# EAGLE board Glove Module- V1 Alle (EAGLE 6.6.0)
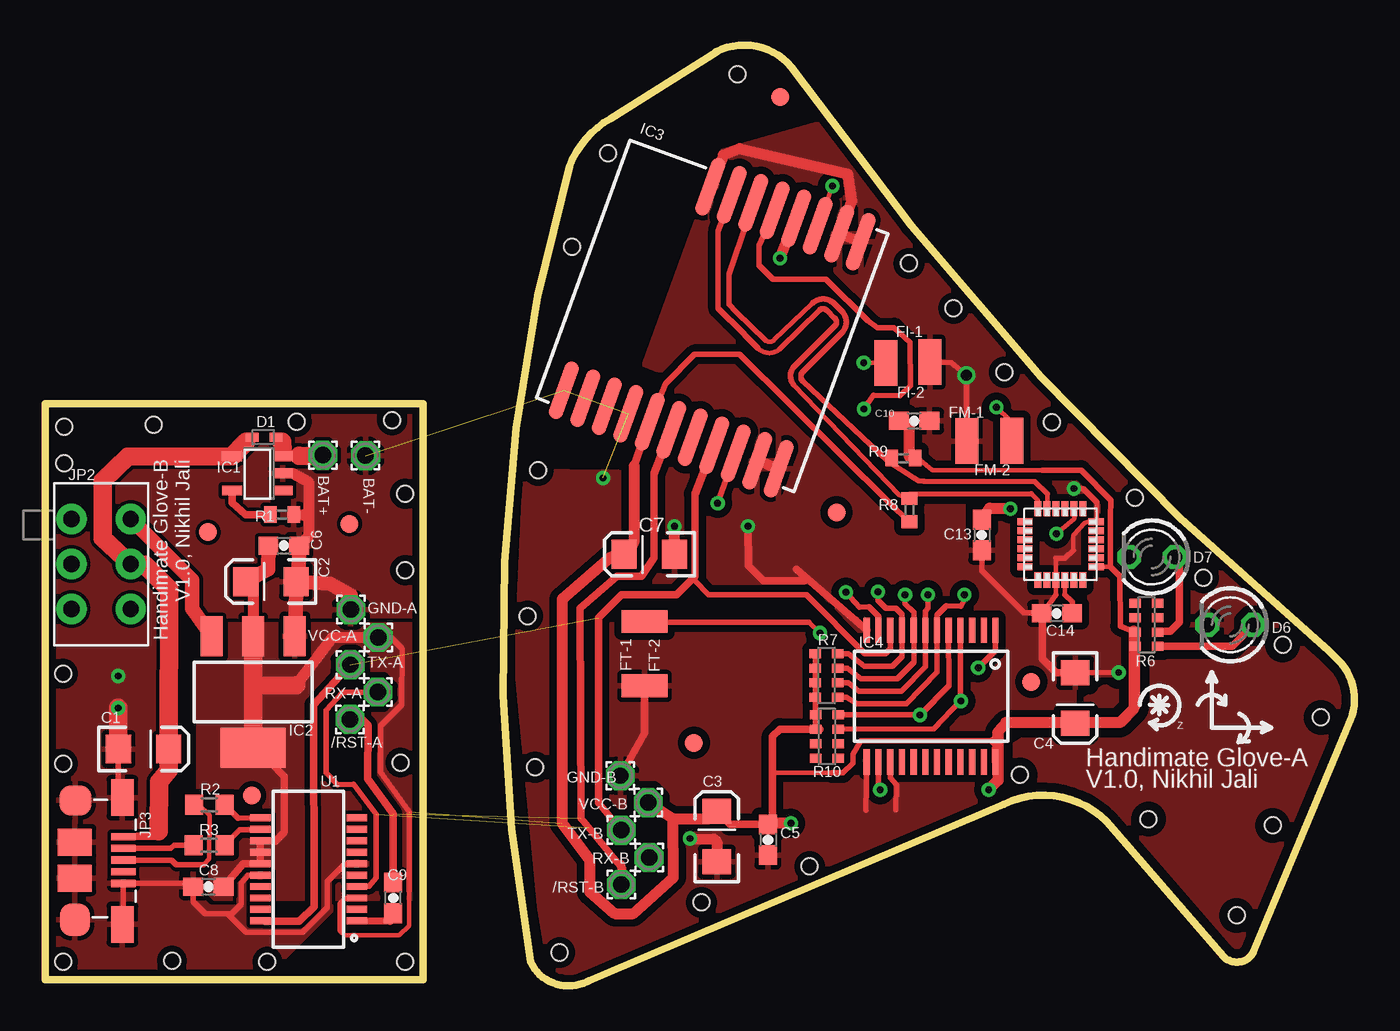
[diagram p0: board, top side]
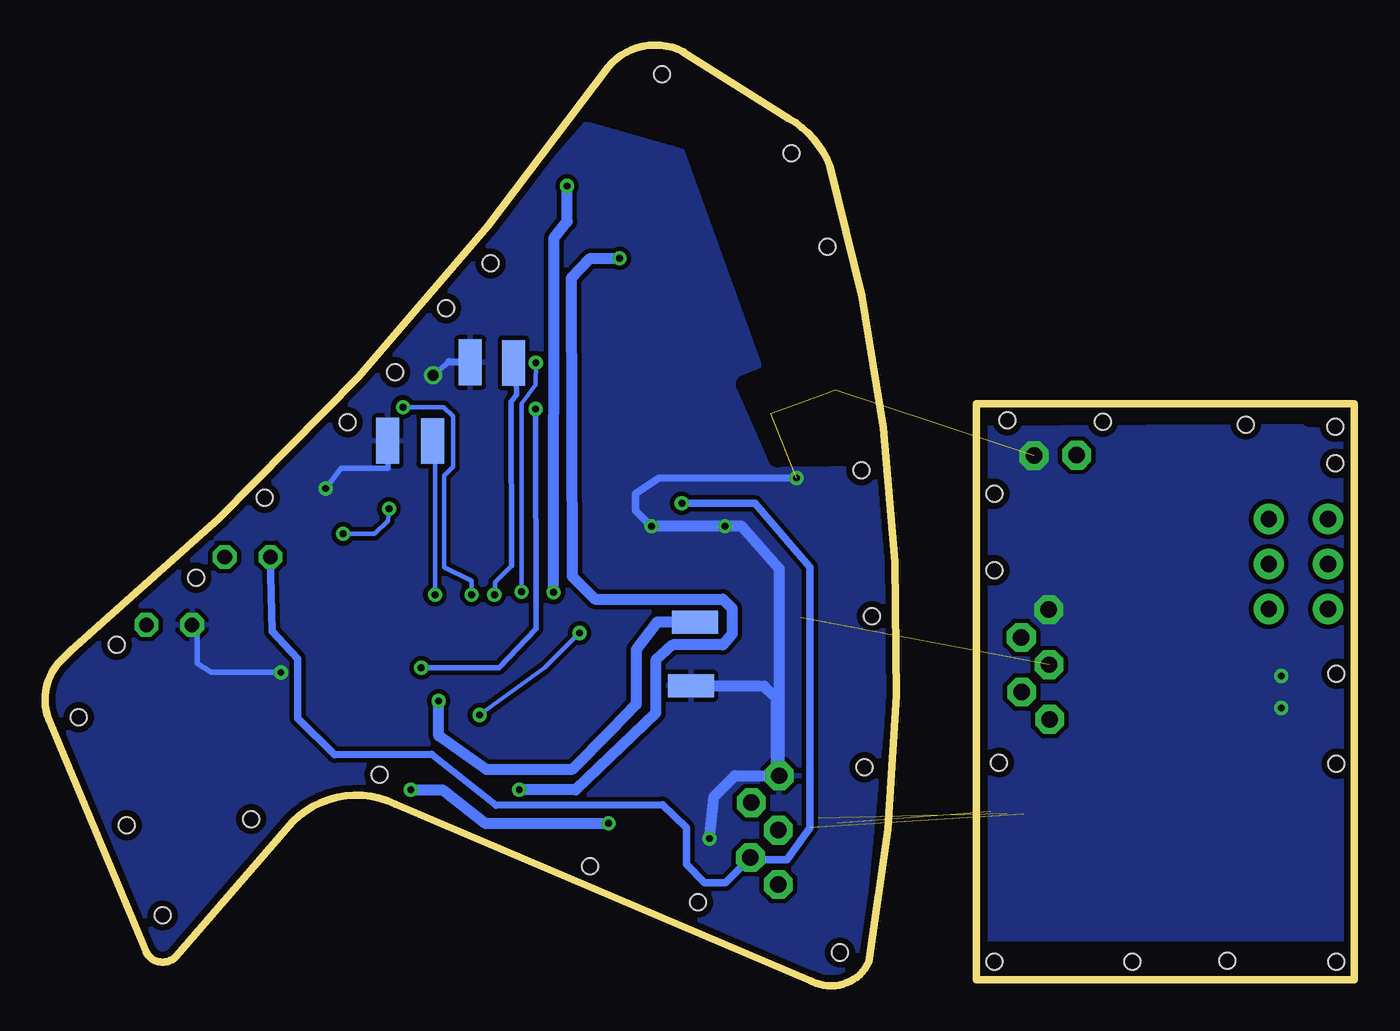
[diagram p1: board, bottom side, seen from below]

Size 72.76 x 52.27 mm. Coordinates in mm from the lower left corner, seen from the top.
Outline: 67.14,1.88 arc-110 65.48,1.65 58.99,9.13 arc71 53.29,10.1
Outline: 37.29,51.89 arc-77 41.48,51.04 arc15 71.32,18.61 71.83,18.12 arc-69 72.53,14.76 67.14,1.89
Outline: 37.34,51.89 31.42,48.18 arc39 29.14,45.54 arc26 26.99,1.34 arc92 30.12,0.25 30.24,0.29 53.29,10.09
Outline: 0,32.35 0,0.35 21,0.35 21,32.35 0,32.35
Copper layers (1*16): Top 0.035mm / dielectric 1.5mm / Bottom 0.035mm
Design rules "4pcb-Advanced Circuits": minimum track width 10mil, minimum drill 15mil, track to track 8mil, track to pad 8mil, pad to pad 8mil, via to via 8mil, smd to smd 8mil, copper to edge 15mil, drill to drill 8mil, minimum pad ring 10mil, minimum via ring 8mil, stop-mask expansion 4mil, vias tented up to drill 0mil, thermal gap 10mil
Holes 0.9 mm at 19.29,31.43 20,1.35 1,1.35 1,17.35 1,12.35 1.08,29.02 20,23.08 12.36,1.35 7.06,1.39 6.04,31.19 20,27.35 13.98,31.34 19.75,12.41 28.6,1.86 27.23,12.14 26.8,20.55 27.39,28.64 31.3,46.25 38.49,50.64 50.49,37.64 55.96,31.3 47.99,40.13 53.32,34.1 60.56,27.11 64.37,22.67 68.78,18.94 70.89,14.92 68.21,8.92 61.31,9.27 54.17,11.73 42.49,6.64 36.49,4.64 66.21,3.92 29.27,41.05 1.08,31.05
tRestrict: area 26.3,29.4 to 33.8,35.7; 2 lines
bRestrict: area 26.3,29.4 to 33.8,35.7; 8 lines

## Footprints (pad centres in the part's own frame; a part is rotated, then mirrored left to right if it is on the bottom)
1,6/0,9 = drill 0.914 pad 1.6 octagon: 1 0,0
EIA3216 = smd 1.4 x 1.6: A 1.4,0; C -1.4,0
0603-CAP = smd 1.1 x 1: 1 -0.85,0; 2 0.85,0
SOD523 = smd 0.7 x 0.5: A 0.7,0; C -0.6,0
LED3MM = drill 0.813 octagon: A -1.27,0; K 1.27,0
SMD1,27-2,54 = smd 1.27 x 2.54: 1 0,0
FIDUCIAL-1X2 = smd 1 x 1: 1 0,0
SOT23-5 = smd 0.55 x 1.1: 1 -0.95,-1.3; 2 0,-1.3; 3 0.95,-1.3; 4 0.95,1.5; 5 -0.95,1.5
SOT223 = smd 1.219 x 2.235: 1 -2.311,-3.099; 2 0,-3.099; 3 2.311,-3.099 | smd 3.6 x 2.2: 4 0,3.099
RFD22301 = smd 3.353 x 0.813: 1 0,0; 2 0,-1.27; 3 0,-2.54; 4 0,-3.81; 5 0,-5.08; 6 0,-6.35; 7 0,-7.62; 8 0,-8.89; 9 13.411,-12.675; 10 13.411,-11.405; 11 13.411,-10.135; 12 13.411,-8.865; 13 13.411,-7.595; 14 13.411,-6.325; 15 13.411,-5.055; 16 13.411,-3.785; 17 13.411,-2.515; 18 13.411,-1.245; 19 13.411,0.025
SSOP24 = smd 0.348 x 1.397: 1 -3.575,-3.656; 2 -2.925,-3.656; 3 -2.275,-3.656; 4 -1.625,-3.656; 5 -0.975,-3.656; 6 -0.325,-3.656; 7 0.325,-3.656; 8 0.975,-3.656; 9 1.625,-3.656; 10 2.275,-3.656; 11 2.925,-3.656; 12 3.575,-3.656; 13 3.575,3.656; 14 2.925,3.656; 15 2.275,3.656; 16 1.625,3.656; 17 0.975,3.656; 18 0.325,3.656; 19 -0.325,3.656; 20 -0.975,3.656; 21 -1.625,3.656; 22 -2.275,3.656; 23 -2.925,3.656; 24 -3.575,3.656
QFN.24.4X4 = smd 0.85 x 0.38: 1 -1.975,1.25; 2 -1.975,0.75; 3 -1.975,0.25; 4 -1.975,-0.25; 5 -1.975,-0.75; 6 -1.975,-1.25; 13 1.975,-1.25; 14 1.975,-0.75; 15 1.975,-0.25; 16 1.975,0.25; 17 1.975,0.75; 18 1.975,1.25 | smd 0.38 x 0.85: 7 -1.25,-1.975; 8 -0.75,-1.975; 9 -0.25,-1.975; 10 0.25,-1.975; 11 0.75,-1.975; 12 1.25,-1.975; 19 1.25,1.975; 20 0.75,1.975; 21 0.25,1.975; 22 -0.25,1.975; 23 -0.75,1.975; 24 -1.25,1.975
SWITCHE-DPDT = drill 0.9 pad 1.676: 1 -2.559,1.579; 2 -0.059,1.579; 3 2.441,1.579; 4 -2.559,-1.721; 5 -0.059,-1.721; 6 2.441,-1.721
USB-MICRO-MOLEX-105017-0001 = smd 0.4 x 1.35: 1 -1.34,1.27; 2 -0.69,1.27; 3 -0.04,1.27; 4 0.61,1.27; 5 1.26,1.27 | smd 2.032 x 1.27: P$1 -3.505,1.219; P$6 3.531,1.219 | smd 1.651 x 1.778: P$2 -3.353,-1.397 | smd 1.5 x 1.9: P$3 -1.04,-1.43; P$4 0.96,-1.43 | smd 1.778 x 1.651: P$5 3.277,-1.422
R0402 = smd 0.7 x 0.9: 1 -0.65,0; 2 0.65,0
R0603 = smd 1 x 1.1: 1 -0.85,0; 2 0.85,0
0603-ARV = smd 0.5 x 0.65: 1 -1.2,-0.625; 2 -0.4,-0.625; 3 0.4,-0.625; 4 1.2,-0.625; 5 1.2,0.625; 6 0.4,0.625; 7 -0.4,0.625; 8 -1.2,0.625
SSOP20_L = smd 0.381 x 1.143: 1 -2.857,-2.68; 2 -2.223,-2.68; 3 -1.587,-2.68; 4 -0.953,-2.68; 5 -0.318,-2.68; 6 0.318,-2.68; 7 0.953,-2.68; 8 1.587,-2.68; 9 2.223,-2.68; 10 2.857,-2.68; 11 2.857,2.68; 12 2.223,2.68; 13 1.587,2.68; 14 0.953,2.68; 15 0.318,2.68; 16 -0.318,2.68; 17 -0.953,2.68; 18 -1.587,2.68; 19 -2.223,2.68; 20 -2.857,2.68

## Placement (x,y rotation side)
/RST-A  [1,6/0,9]  16.94,14.81 0 top
/RST-B  [1,6/0,9]  32.02,5.63 90 top
BAT+  Bat+  [1,6/0,9]  15.44,29.48 270 top
BAT-  Bat-  [1,6/0,9]  17.81,29.46 270 top
C1  10uF  [EIA3216]  5.48,13.16 0 top
C2  10uF  [EIA3216]  12.55,22.46 180 top
C3  10uF  [EIA3216]  37.33,8.3 90 top
C4  10uF  [EIA3216]  57.24,16 270 top
C5  0.1uF  [0603-CAP]  40.17,8.12 270 top
C6  0.1uF  [0603-CAP]  13.27,24.46 0 top
C7  10uF  [EIA3216]  33.58,23.98 180 top
C8  0.1uF  [0603-CAP]  9.09,5.51 180 top
C9  0.1uF  [0603-CAP]  19.35,4.9 90 top
C10  0.1uF  [0603-CAP]  48.3,31.39 0 top
C13  2.2nF  [0603-CAP]  52.05,25.05 270 top
C14  0.1uF  [0603-CAP]  56.22,20.7 180 top
D1  PMEG3005EB  [SOD523]  12.13,30.49 0 top
D6  Green  [LED3MM]  65.86,20.06 180 top
D7  Red  [LED3MM]  61.51,23.83 180 top
FI-1  WIREPADSMD1,27-254  [SMD1,27-2,54]  46.72,34.61 0 top
FI-2  WIREPADSMD1,27-254  [SMD1,27-2,54]  46.73,34.61 0 bottom
FID1  FIDUCIAL1X2  [FIDUCIAL-1X2]  16.92,25.67 270 top
FID2  FIDUCIAL1X2  [FIDUCIAL-1X2]  11.49,10.59 270 top
FID3  FIDUCIAL1X2  [FIDUCIAL-1X2]  36.06,13.51 0 top
FID4  FIDUCIAL1X2  [FIDUCIAL-1X2]  9.06,25.22 270 top
FID5  FIDUCIAL1X2  [FIDUCIAL-1X2]  54.8,16.89 0 top
FID6  FIDUCIAL1X2  [FIDUCIAL-1X2]  40.85,49.37 0 top
FID7  FIDUCIAL1X2  [FIDUCIAL-1X2]  43.98,26.31 0 top
FM-1  WIREPADSMD1,27-254  [SMD1,27-2,54]  53.72,30.29 180 top
FM-2  WIREPADSMD1,27-254  [SMD1,27-2,54]  51.23,30.26 0 bottom
FT-1  WIREPADSMD1,27-254  [SMD1,27-2,54]  33.31,20.25 90 top
FT-2  WIREPADSMD1,27-254  [SMD1,27-2,54]  36.64,20.21 90 bottom
G1  WIREPADSMD1,27-254  [SMD1,27-2,54]  49.16,34.66 180 top
G2  WIREPADSMD1,27-254  [SMD1,27-2,54]  49.14,34.64 180 bottom
G3  WIREPADSMD1,27-254  [SMD1,27-2,54]  33.31,16.67 270 top
G4  WIREPADSMD1,27-254  [SMD1,27-2,54]  36.87,16.67 90 bottom
G5  WIREPADSMD1,27-254  [SMD1,27-2,54]  51.23,30.26 0 top
G6  WIREPADSMD1,27-254  [SMD1,27-2,54]  53.72,30.29 0 bottom
GND-A  [1,6/0,9]  16.99,20.9 0 top
GND-B  [1,6/0,9]  31.97,11.68 90 top
IC1  MCP73831  [SOT23-5]  11.9,28.47 90 top
IC2  AZ1117CH-3.3TRG1  [SOT223]  11.57,16.33 180 top
IC3  RF22301  [RFD22301]  45.33,41.35 250 top
IC4  MUX-74HC4067SMD  [SSOP24]  49.24,16.1 180 top
IC5  MPU-6050  [QFN.24.4X4]  56.43,24.53 0 top
JP2  [SWITCHE-DPDT]  3.19,23.38 270 top
JP3  USB-CON-5PIN-105017-0001  [USB-MICRO-MOLEX-105017-0001]  3.08,6.95 270 top
R1  10k  [R0402]  13.18,26.19 180 top
R2  27E  [R0603]  9.14,10.07 180 top
R3  27E  [R0603]  9.12,7.82 180 top
R6  75E  [0603-ARV]  61.2,20.06 90 top
R7  150k  [0603-ARV]  43.42,17.24 270 top
R8  10k  [R0402]  48.03,26.44 270 top
R9  10k  [R0402]  47.69,29.32 0 top
R10  150k  [0603-ARV]  43.45,13.86 270 top
RX-A  [1,6/0,9]  18.49,16.33 0 top
RX-B  [1,6/0,9]  33.57,7.13 90 top
TX-A  [1,6/0,9]  16.97,17.84 0 top
TX-B  [1,6/0,9]  32.02,8.66 90 top
U1  FTS31XS-U  [SSOP20_L]  14.64,6.48 90 top
VCC-A  [1,6/0,9]  18.52,19.36 0 top
VCC-B  [1,6/0,9]  33.52,10.18 90 top

## Library data of the parts
/RST-A /RST-B BAT+ BAT- FI-1 FI-2 FM-1 FM-2 FT-1 FT-2 G1-G6 GND-A GND-B RX-A RX-B TX-A TX-B VCC-A VCC-B = wirepad
C1-C4 C7 = SparkFun-Capacitors; PROD_ID: CAP-00811
C5 C6 C8-C10 C13 C14 = SparkFun-Capacitors; PROD_ID: CAP-08604
D1 = diode
D6 D7 = led
FID1-FID7 = SparkFun-Aesthetics
IC1 IC3 JP3 = GeekAmmo
IC2 = SparkFun-PowerIC; PROD_ID: VREG-08170
IC4 = SparkFun-AnalogIC
IC5 = MPU6050
JP2 = Switch
R1 R8 R9 = rcl
R2 R3 = resistor
R6 R7 R10 = SparkFun-Passives
U1 = SparkFun-DigitalIC; PROD_ID: IC-11524

## Nets
+5V: C1.A D1.C IC1.4 JP2.2 JP3.1
ACOM: IC3.5 IC4.1
GND: BAT-.1 C1.C C2.C C3.C C4.C C5.2 C6.2 C7.C C8.2 C10.2 C13.2 C14.2 D6.K G1.1 G2.1 G3.1 G4.1 G5.1 G6.1 GND-A.1 GND-B.1 IC1.2 IC2.1 IC3.1 IC3.2 IC3.8 IC3.9 IC3.10 IC3.12 IC3.18 IC3.19 IC4.12 IC4.13 IC4.15 IC5.9 IC5.18 JP3.5 JP3.P$1 JP3.P$2 JP3.P$3 JP3.P$4 JP3.P$5 JP3.P$6 R1.1 U1.6 U1.16
I2C_N: IC3.7 IC5.24 R8.1
I2C_P: IC3.6 IC5.23 R9.1
N$1: C9.1 U1.1
N$2: JP3.2 R3.2
N$3: IC1.5 R1.2
N$4: JP3.3 R2.2
N$5: D6.A R6.1
N$6: D7.A R6.2
N$7: IC2.3 JP2.1
N$8: BAT+.1 D1.A IC1.3
N$9: FI-1.1 IC4.9 R7.8
N$10: C14.1 IC5.10
N$11: C13.1 IC5.20
N$12: FI-2.1 IC4.8 R7.7
N$13: FM-1.1 IC4.7 R7.6
N$14: FM-2.1 IC4.6 R7.5
N$15: FT-1.1 IC4.5 R10.8
N$16: FT-2.1 IC4.4 R10.7
RST/: /RST-A.1 /RST-B.1 C9.2 IC3.14
RX/LED: D7.K IC3.17 RX-A.1 RX-B.1 U1.4
S1: IC3.3 IC4.11
S2: IC3.4 IC4.14
TX/S0: IC3.16 IC4.10 TX-A.1 TX-B.1 U1.20
USB-NEG: R3.1 U1.12
USB-POS: R2.1 U1.11
VCC: C2.A C3.A C4.A C5.1 C6.1 C7.A C8.1 C10.1 IC2.2 IC2.4 IC3.13 IC4.24 IC5.13 R6.7 R6.8 R7.1 R7.2 R7.3 R7.4 R8.2 R9.2 R10.1 R10.2 U1.3 U1.13 U1.14 U1.15 VCC-A.1 VCC-B.1

## Tracks (layer width: path | path; a pad name or v marks a point on that pad's centre or on a via)
+5V
  Top 0.254: D1.C 11.19,30.22
  Top 0.406: 6.31,8.59 6.31,8.31 5.12,8.31 JP3.1
  Top 0.813: IC1.4 10.28,29.34
  Top 1.016: 11.19,30.22 IC1.4 4.59,29.41 3.2,28.08 3.2,24.86 JP2.2 5.53,23.41 6.89,22.05 C1.A 6.87,11.99 6.33,11.35 6.31,8.59
ACOM  (via drill 0.38)
  Top 0.305: v51.85,17.67 52.81,18.63 IC4.1 | IC3.5 39.68,41.11 39.68,40.03 40.46,39.26 43.4,39.26 45.72,36.96 46.24,36.56 47.17,36.57 48.06,35.74 48.08,33.34 47.51,32.79 46.02,32.8 v45.51,32.05
  Bottom 0.305: v45.51,32.05 45.46,19.84 47.54,17.67 v51.85,17.67
GND  (via drill 0.38, 0.61)  (4 unrouted)
  Top 0.254: 56.17,21.74 IC5.9 | IC5.9 56.18,23.75 | 57.14,24.19 57.14,25.03 57.77,25.74 58.03,25.8 58.38,25.8 | 58.45,26.87 58.46,25.84 IC5.18 | IC1.2 13.78,28.48
  Top 0.305: C8.2 8.03,5.72 | U1.16 12.19,6.12 11.29,6.15 10.91,5.71 10.91,4.55 10.37,4.01 10.14,4.01 | 10.14,4.01 8.9,4.01 8.24,4.67 C8.2 | U1.6 17.55,6.76 16.65,6.76 15.68,5.79 15.68,4.34 14.31,2.97 11.19,2.97 10.14,4.01 | 55.4,20.61 56.17,21.74 | 56.18,23.75 56.68,23.77 57.14,24.19 | 58.38,25.8 IC5.18 | C13.2 52.05,23.07 52.42,22.7 53.63,21.48 54.39,20.72 55.35,20.72 C14.2 | v59.65,17.41 C4.C | 45.62,9.76 IC4.13 | G5.1 v51.2,33.93 50.36,34.62 G1.1 | IC4.15 46.97,11.56 47.3,11.16 47.28,9.8 | v57.17,27.63 57.69,27.63 58.45,26.87 | C8.2 8.05,5.69 JP3.5 4.35,3.47 JP3.P$6 | 4.06,12.85 4.06,11.47 JP3.P$1
  Top 0.406: 14.1,22.65 C2.C | 13.92,20.48 IC2.1 | C4.C 56.19,17.4 55.41,18.18 55.41,20.66 C14.2 55.4,20.61 | IC5.9 | G3.1 33.31,14.03 GND-B.1 | IC4.12 41.76,23.14 | 42.2,22.5 39.92,22.5 39.08,23.34 v39.06,25.53
  Top 0.61: v35.83,8.19 37.17,8.16 37.33,8 C3.C | C7.C v34.99,25.54 | IC3.8 37.69,46.16 38.61,46.51 44.59,45.11 44.82,43.57 IC3.2 IC3.1 | 13.78,28.48 14.64,28 14.64,25.97 | 14.64,25.97 14.64,24.99 C6.2 | R1.1 14.42,26.19 14.64,25.97 | IC3.18 40.15,28.98 IC3.19
  Top 0.813: C6.2 14.1,22.65 | 13.92,20.48 C2.C 15.83,22.35 16.99,21.7 GND-A.1 | C1.C 4.06,12.85
  Top 1.016: 4.06,12.85 v4.07,15.44
  Bottom 0.305: D6.K 64.3,19.73 64.3,17.93 63.54,17.42 v59.65,17.41 | 33.08,16.67 33.06,16.66 32.8,16.66 | 32.3,16.15 32.3,12.01 GND-B.1 | G6.1 53.71,28.75 56.29,28.76 v57.17,27.63 | 50.32,34.66 v51.2,33.93
  Bottom 0.406: 50.32,34.66 G2.1 | 39.1,25.53 39.94,26.38 39.94,27.33 38.67,28.2 v31.01,28.22
  Bottom 0.61: G4.1 33.08,16.67 | 32.8,16.66 32.3,16.15 | v35.83,8.19 35.6,10.51 34.43,11.68 GND-B.1 31.97,23.18 34.07,25.55 v34.99,25.54 39.1,25.53 v39.06,25.53
  other vias: 4.07,17.22
  pour Bottom (isolate 0.254, rank 6, no thermals): 21,32.35 0,32.35 0,0.35 21,0.35
  pour Top (isolate 0.406, rank 2): 30.01,0.15 54.36,10.99 arc-69 59.15,9.85 65.51,2.4 arc115 67.25,2.7 71.74,14.19 arc71 70.84,18.25 60.51,28.64 arc-7 54.24,35.01 42.96,47.9 37.63,46.37 32.76,33.77 28.89,35.21 26.71,28.85 26.2,17.93 27.47,4.46 27.98,1.42 28.74,0.4
  pour Bottom (isolate 0.254, rank 6): 29.76,0.15 53.89,10.24 arc-69 58.69,9.11 65.23,1.87 arc115 66.97,2.17 72.2,14.56 arc71 71.3,18.62 60.25,28.64 arc-7 53.99,35.01 42.71,47.9 37.38,46.37 32.71,33.8 28.86,35.23 26.45,28.85 25.95,17.93 27.22,4.46 27.72,1.42 28.49,0.4
  pour Top (rank 6): 20.96,32.02 20.96,9.29 11.94,0.27 0.13,0.27 0.13,32.02
I2C_N
  Top 0.254: IC5.24 55.18,26.98 54.81,27.35 | 48.11,27.32 48.03,27.33 R8.1 47.47,27.25 41.59,33.4 | 39.62,35.43 arc90 40.83,35.39 | 37.98,37.07 38.1,36.94 38.06,36.99
  Top 0.305: 48.11,27.32 54.81,27.35 | 38.06,36.99 37.4,37.64 37.4,41.92 IC3.7 | 38.1,36.94 39.62,35.43 | 40.83,35.39 43.03,37.55 arc-90 43.44,37.53 43.88,37.1 arc-90 43.9,36.66 41.72,34.51 arc90 41.59,33.4
I2C_P
  Top 0.254: IC5.23 55.69,27.34 | IC3.6 38.9,43.06 38.9,42.06 39.15,43.33 | 40.03,35.87 arc90 40.52,35.89 42.64,37.92 | 38.43,37.43 38.41,37.46 | R9.1 47.01,29.32 46.82,29.14
  Top 0.305: 55.69,27.34 55.01,28 48.83,28.03 48.54,28.07 48.32,28.21 46.82,29.14 42.11,33.58 arc-90 42.11,34.12 44.27,36.29 arc90 44.27,37.47 43.83,37.92 arc90 42.64,37.92 | 38.41,37.46 37.99,37.86 37.99,39.54 IC3.6 | 38.43,37.43 40.03,35.87
N$1
  Top 0.406: C9.1 19.18,3.6 U1.1
N$2
  Top 0.305: 8.12,7.67 R3.2 7.17,7.82 6.99,7.64 5.12,7.64 JP3.2
N$3
  Top 0.406: R1.2 11.16,26.18 10.41,26.84 IC1.5
N$4
  Top 0.254: 8.81,6.73 9.13,7.08 9.14,9.47 8.53,10.07
  Top 0.305: 8.81,6.73 7.3,6.73 7.04,6.98 5.09,6.98 5.08,6.99 JP3.3 | 8.53,10.07 R2.2
N$5
  Top 0.406: R6.1 65.97,18.86 D6.A
N$6
  Top 0.406: D7.A 63.03,23.77 63.03,20.21 62.52,19.7 61.87,19.7 R6.2
N$7
  Top 0.813: JP2.1 4.81,25.91 8.19,22.53 8.19,20.95 IC2.3
N$8
  Top 0.254: 14.12,29.46 IC1.3 13.19,29.74 | D1.A 13.17,30.24
  Top 1.016: BAT+.1 15.44,29.43 14.12,29.46 | 13.17,30.24 13.19,29.74
N$9  (via drill 0.38)
  Top 0.254: v45.49,34.62 FI-1.1
  Top 0.305: R7.8 44.63,18.44 45.53,17.75 47.08,17.75 47.61,18.28 IC4.9 47.61,20.64 47.28,20.97 46.74,20.98 46.28,21.44 v46.28,21.9
  Bottom 0.254: v46.28,21.9 46.29,32.33 45.5,33.39 v45.49,34.62
N$10
  Top 0.254: 56.68,21.74 IC5.10
  Top 0.305: C14.1 57.07,21.34 56.68,21.74
N$11  (via drill 0.38)
  Top 0.254: 53.64,26.53 v53.65,26.51 | v56.2,25.11 57.19,25.94 IC5.20
  Top 0.61: C13.1 52.49,26.54 53.64,26.53
  Bottom 0.254: v53.65,26.51 53.7,25.85 54.44,25.11 v56.2,25.11
N$12  (via drill 0.38)
  Top 0.305: R7.7 44.6,17.64 45.33,17.06 47.35,17.06 48.27,17.98 IC4.8 | IC4.8 | IC4.8 48.27,20.75 47.79,21.23 v47.79,21.74
  Bottom 0.254: v47.79,21.74 47.76,22.43 46.84,23.35
  Bottom 0.305: 46.84,23.35 46.86,32.45 46.56,32.85 46.61,34.56 FI-2.1
N$13  (via drill 0.38)
  Top 0.254: v52.87,32.15 53.64,31.39 FM-1.1
  Top 0.305: R7.6 44.63,16.84 45.23,16.38 47.59,16.38 48.91,17.72 IC4.7 48.91,20.83 49.06,20.97 v49.06,21.74
  Bottom 0.254: v49.06,21.74 49.06,22.5 50.58,23.26 50.58,28.34 50.08,28.85 50.08,31.64 50.61,32.13 52.64,32.13 v52.87,32.15
N$14  (via drill 0.38)
  Top 0.305: R7.5 44.52,16.05 45.12,15.67 47.87,15.67 49.57,17.42 IC4.6 49.57,20.59 50.08,21.11 50.89,21.1 51.11,21.49 v51.09,21.74
  Bottom 0.254: v51.09,21.74 51.09,30.64 FM-2.1
N$15  (via drill 0.38)
  Top 0.254: 50.2,19.74 IC4.5 | v43.06,19.61 42.46,20.21
  Top 0.305: 50.23,19.74 IC4.5 | 42.46,20.21 32.33,20.21 FT-1.1 | 50.2,19.74 50.22,16.68 48.65,15.06 45.25,15.06 v48.62,15.05 R10.8
  Bottom 0.254: v43.06,19.61 45,17.67 v48.62,15.05
N$16  (via drill 0.38)
  Top 0.305: IC4.4 50.86,15.84 | 50.86,15.84 49.4,14.28 R10.7 | v50.89,15.83 50.86,15.84
  Bottom 0.61: FT-2.1 38.75,20.21 39.92,18.69 39.92,15.64 41.32,14.2 43.48,12.02 48.23,12.02 50.88,13.89 v50.89,15.83
RANDOM
  pour Top (isolate 0.508, no thermals): 52.47,10.33 arc-69 59.31,9.98 65.46,2.51 arc115 67.2,2.81 71.95,14.72 arc71 68.85,20.08 68.5,20.21 64.95,20.54 51.85,12.08 52.1,11.84
RST/  (1 unrouted)
  Top 0.406: C9.2 19.33,9.58 17.93,11.51 17.94,14.48 17.61,14.81 /RST-A.1 | /RST-B.1 32.02,6.78 32.1,6.52 29.79,9.33 29.74,20.97 31.77,22.75 33.13,22.75 33.85,23.79 33.85,28.44 IC3.14
RX/LED  (via drill 0.38)  (1 unrouted)
  Top 0.305: IC3.17 v37.38,26.82 | RX-A.1 16.52,16.33 15.62,15.33 15.61,11.85 16.27,11.19 17.15,11.2 18.4,9.53 18.4,6 18.02,5.53 U1.4
  Bottom 0.305: 33.44,7 RX-B.1
  Bottom 0.406: v37.38,26.82 33.31,26.82 30.26,23.26 30.26,8.78 31.53,7 33.44,7 | D7.K 60.15,19.7 58.71,18.18 58.71,14.88 56.68,12.85 51.27,12.86 47.7,10.04 38.46,10.06 37.12,8.78 37.12,6.75 36.11,5.73 34.96,5.73 RX-B.1
S1  (via drill 0.38)
  Top 0.254: IC4.11 46.33,20.5 | v43.75,44.43 IC3.3
  Top 0.305: 46.33,20.5 45.77,21.05 45.26,21.05 v44.5,21.86
  Bottom 0.61: v44.5,21.86 44.49,41.55 43.75,42.47 v43.75,44.43
S2  (via drill 0.38)
  Top 0.305: IC4.14 46.31,11.25 46.31,10.89 v46.4,10.89
  Top 0.61: v40.84,40.42 IC3.4
  Bottom 0.61: v46.4,10.89 43.28,10.89 38.83,15.16 38.83,18.09 37.88,18.94 35.09,18.94 34.58,19.54 34.58,20.97 35.09,21.48 42.2,21.48 43.47,22.75 43.53,39.32 42.48,40.42 v40.84,40.42
TX/S0  (1 unrouted)
  Top 0.305: 12.21,3.61 U1.20 | 36.11,22.75 36.11,22.5 36.87,21.74 42.32,21.74 45.57,18.46 46.7,18.46 46.98,18.74 46.98,19.74 IC4.10 | TX-B.1 31.41,8.66
  Top 0.406: 12.21,3.61 14.13,3.61 14.95,4.4 14.92,15.61 TX-A.1 | TX-B.1 30.76,10.17 30.76,20.47 32.03,21.74 35.09,21.74 36.11,22.75 36.11,27.32 IC3.16
USB-NEG
  Top 0.305: R3.1 10.83,8.69 12.21,8.69 U1.12
USB-POS
  Top 0.305: U1.11 10.74,9.32 R2.1
VCC  (via drill 0.38)  (1 unrouted)
  Top 0.254: IC5.13 59.2,23.28 | R9.2 48.04,29.38 48.48,29.34 49.32,28.65 55.41,28.65 | 43.73,11.83 40.42,11.83 | 20.24,5.29 20.24,3.35 19.69,2.81 16.64,2.81 16.38,3.07 16.38,4.59 16.64,4.85 17.28,4.85 U1.3
  Top 0.305: 12.53,12.42 12.53,12.72 IC2.4 | VCC-A.1 19.24,19.35 19.85,18.75 19.82,15.62 18.65,14.45 18.65,11.86 20.24,9.68 20.24,5.29 | R6.8 R6.7 59.75,19.99 59.73,22.75 59.2,23.28 59.2,26.03 59.21,26.98 57.58,28.65 55.41,28.65 | R10.2 R10.1 R7.4 R7.3 R7.2 R7.1 | 43.73,11.83 44.34,11.83 44.9,12.36 44.9,12.87 45.35,13.61 52.64,13.61 | 52.79,13.46 52.79,12.46 IC4.24 | R8.2 47.97,25.82 46.94,26.81 38.6,35.08 36.1,35.08 34.48,33.46 33.82,31.81 IC3.13
  Top 0.406: C8.1 11.02,6.79 U1.15 U1.14 U1.13 12.81,8.05 13.29,8.53 13.29,11.66 12.53,12.42 | C2.A 11.56,22.51 | 36.85,10.18 C3.A 38.05,8.97 C5.1 40.42,9.23 40.42,11.83 40.42,13.86 40.82,14.26 R10.2 43.07,14.26 | IC4.24 52.84,14.09 53.29,14.54 C4.A 59.85,14.6 60.57,15.31 60.57,15.58 R6.8 | 52.64,13.61 52.79,13.46 | IC3.13 32.73,28.89
  Top 0.61: 11.56,22.51 IC2.2 | 32.73,28.89 32.73,24.71 32.3,23.77 | 32.3,23.77 31.45,23.83 28.74,21.48 28.74,9.04 30.26,7 30.26,5.23 31.66,4.01 32.67,4.02 34.91,6.03 34.9,9.29 | 34.9,9.29 VCC-B.1 | 34.9,9.29 36.92,9.29 C3.A | 32.3,23.77 32.3,23.86 C7.A | 13.94,16.69 15.97,19.36 VCC-A.1 | 60.57,15.58 60.57,19.63 60.49,19.7 60.49,15.39 59.73,14.62 53.38,14.62 52.96,14.12 52.96,11.42 v52.43,10.89 | v41.44,9.04 40.17,9.04 | 48.04,29.38 48.04,31.13 C10.1
  Top 0.813: C6.1 12.4,23.15 C2.A | 11.61,16.69 11.58,16.31
  Top 1.016: IC2.2 11.58,16.31 IC2.4 | 13.94,16.69 11.61,16.69
  Bottom 0.61: v52.43,10.89 50.66,10.89 48.3,9.04 v41.44,9.04
  pour Top (isolate 0.305, rank 2, no thermals): 20.45,20.09 8.51,20.09 8.51,5.76 9.43,4.85 20.45,4.85

## Text on the board
tPlace: Handimate Glove-B / V1.0, Nikhil Jali | Z | Handimate Glove-A / V1.0, Nikhil Jali
tDocu: +Y | +X | Note: Unrouted connetions connected using wires through: / Vcc-A,B Gnd-A,B Tx-A,B Rx-A,B RST-A,B